# EAGLE board KeyChain (EAGLE 7.7.0)

Size 31 x 12 mm. Coordinates in mm from the lower left corner, seen from the top.
Outline: 31,9 31,3 arc-90 28,0 3,0 arc-90 0,3 0,9 arc-90 3,12 28,12 arc-90 31,9
Copper layers (1*16): Top 0.035mm / dielectric 1.5mm / Bottom 0.035mm
Design rules "default": minimum track width 10mil, minimum drill 24mil, track to track 8mil, track to pad 8mil, pad to pad 8mil, via to via 8mil, smd to smd 8mil, copper to edge 40mil, drill to drill 8mil, minimum pad ring 10mil, minimum via ring 8mil, stop-mask expansion 4mil, vias tented up to drill 0mil, thermal gap 10mil
Holes 3.2 mm at 28,9 28,3

## Placement (x,y rotation side)
E$1  [TINRS_ROCKET]  18.43,6 0 top
E$2  [TINRSLOGO]  13.62,6 0 bottom

## Library data of the parts
E$1 E$2 = EurorackModularParts